# EAGLE board meteo-slave (EAGLE 9.0.0)
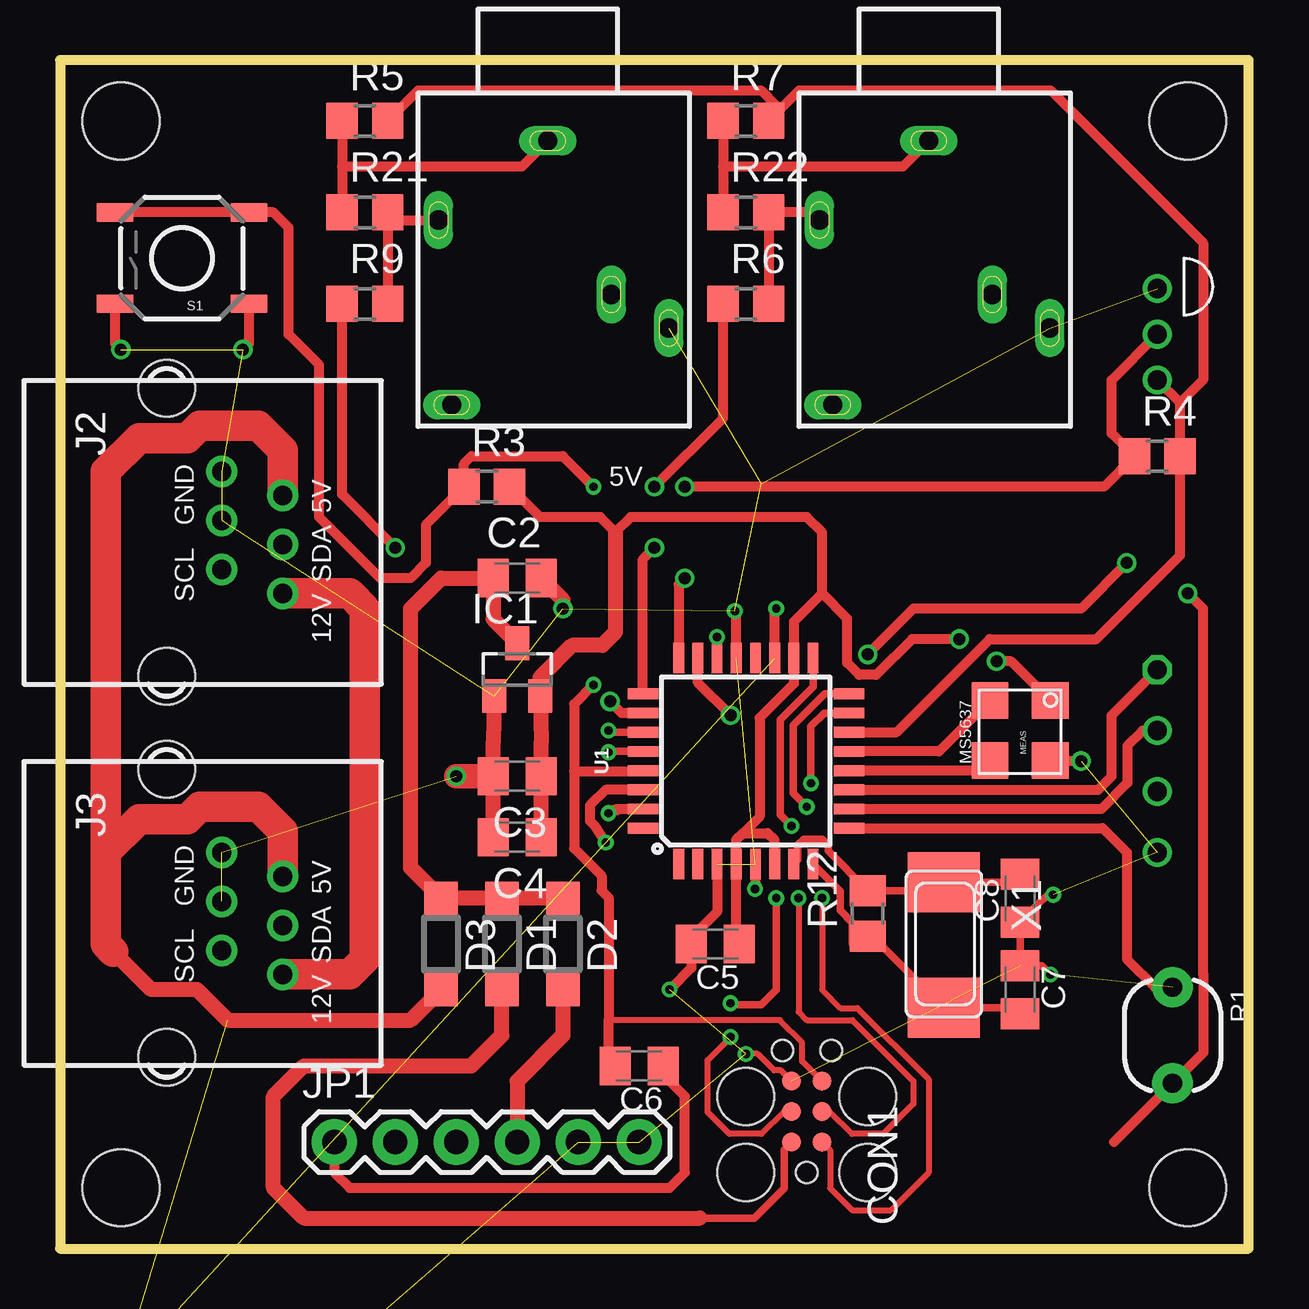
[diagram p0: board, top side]
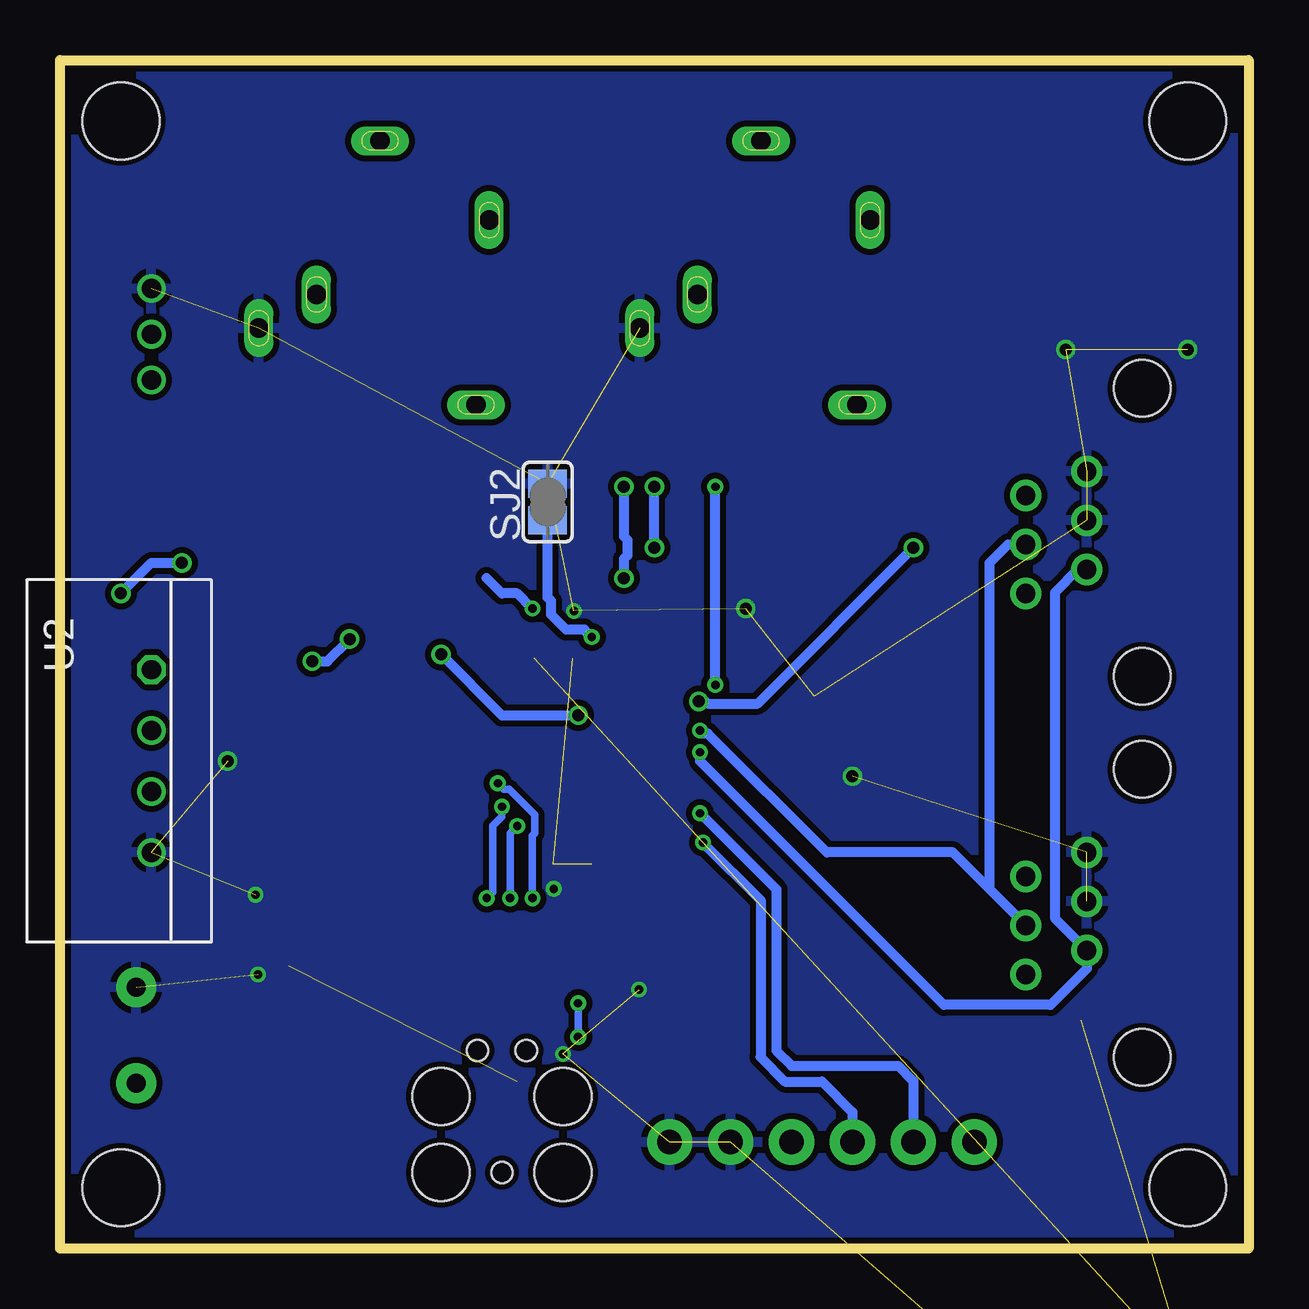
[diagram p1: board, bottom side, seen from below]

Size 49.53 x 49.53 mm. Coordinates in mm from the lower left corner, seen from the top.
Outline: 0,0 49.53,0 49.53,49.53 0,49.53 0,0
Copper layers (1*16): Top 0.035mm / dielectric 0.2mm / Bottom 0.035mm
Design rules "SeeedStudio_DRU_no_angle_20130527 *": minimum track width 8mil, minimum drill 12mil, track to track 6mil, track to pad 6mil, pad to pad 6mil, via to via 6mil, smd to smd 0mil, copper to edge 10mil, drill to drill 10mil, minimum pad ring 6mil, minimum via ring 6mil, stop-mask expansion 2mil, vias tented up to drill 25mil, thermal gap 10mil
Net classes: 0 default: width 0.254 mm, clearance 0.25 mm; 1 power: width 0.254 mm, drill 0.305 mm, clearance 0.25 mm; 2 VIN: width 0.406 mm, clearance 0.25 mm; 3 fine: width 0.406 mm, clearance 0.25 mm; 4 aref: width 0.406 mm, clearance 0.25 mm
Holes 3.2 mm at 2.54,46.99 46.99,46.99 46.99,2.54 2.54,2.54

## Footprints (pad centres in the part's own frame; a part is rotated, then mirrored left to right if it is on the bottom)
C0805K = smd 1.3 x 1.6: 1 -1,0; 2 1,0
TC2030-MCP = smd 0.787 x 0.787: 5V 1.27,0.635; GND 3.81,0.635; MISO 1.27,-0.635; MOSI 2.54,0.635; RESET 3.81,-0.635; SCK 2.54,-0.635 | hole 0.889: 0,0; 5.08,-1.016; 5.08,1.016 | hole 2.375: 0,2.54; 0,-2.54; 3.175,-2.54; 3.175,2.54
SOD123 = smd 1.4 x 1.4: A 1.9,0; C -1.9,0
SOT23 = smd 1 x 1.4: 1 -0.95,-1.1; 2 0.95,-1.1; 3 0,1.1
RJ12-RIGHTANGLE-I2C = drill 0.8 pad 1.3: +5V -1.54,4.84; +12V 2.54,4.84; GND1 -2.54,2.3; GND2 -0.5,2.3; SCL 1.54,2.3; SDA 0.5,4.84 | hole 2.36: -6,0; 6,0
1X06 = drill 1.016 pad 1.88: 1 0,0; 2 2.54,0; 3 5.08,0; 4 7.62,0; 5 10.16,0; 6 12.7,0
PHOTOCELL = drill 0.8 pad 1.676: 1 -2,0; 2 2,0
R0805 = smd 1.3 x 1.5: 1 -0.95,0; 2 0.95,0
TACTILE-SWITCH-SMD-ALT01 = smd 1.524 x 0.762: 1 -2.794,1.905; 2 2.794,1.905; 3 -2.794,-1.905; 4 2.794,-1.905
SJ = smd 1.168 x 1.6: 1 -0.762,0; 2 0.762,0
TQFP32-08 = smd 1.27 x 0.45: 1 -4.293,2.8; 2 -4.293,2; 3 -4.293,1.2; 4 -4.293,0.4; 5 -4.293,-0.4; 6 -4.293,-1.2; 7 -4.293,-2; 8 -4.293,-2.8; 17 4.293,-2.8; 18 4.293,-2; 19 4.293,-1.2; 20 4.293,-0.4; 21 4.293,0.4; 22 4.293,1.2; 23 4.293,2; 24 4.293,2.8 | smd 0.45 x 1.27: 9 -2.8,-4.293; 10 -2,-4.293; 11 -1.2,-4.293; 12 -0.4,-4.293; 13 0.4,-4.293; 14 1.2,-4.293; 15 2,-4.293; 16 2.8,-4.293; 25 2.8,4.293; 26 2,4.293; 27 1.2,4.293; 28 0.4,4.293; 29 -0.4,4.293; 30 -1.2,4.293; 31 -2,4.293; 32 -2.8,4.293
RHT03_DHT-22 = drill 0.8: DATA -1.27,0; GND 3.81,0; NULL 1.27,0 | drill 0.8 octagon: VDD -3.81,0
DS1820 = drill 0.8: DQ 2.54,-1.27; GND 0.635,-1.27; VDD 4.445,-1.27
MS5637WIDE = smd 1.524 x 1.524: GND 1.254,1.254; SCL 1.254,-1.254; SDA -1.254,-1.254; VDD -1.254,1.254
NX6035 = smd 2.5 x 3: P$1 2.665,0; P$2 -2.565,0
1503_09 = drill 0.8 pad 1.2 long: 1 0,-2.1; 2 -4.55,-5.4; 3 5.05,-9.9; 4 -4,-13.1; 5 2.65,-8.5

## Placement (x,y rotation side)
C2  10u  [C0805K]  19.05,27.94 0 top
C3  10u  [C0805K]  19.05,19.68 180 top
C4  100nF  [C0805K]  19.05,17.14 180 top
C5  100nF  [C0805K]  27.3,12.7 180 top
C6  100nF  [C0805K]  24.13,7.62 180 top
C7  18pF  [C0805K]  40.01,10.79 270 top
C8  18pF  [C0805K]  40.01,14.61 90 top
C11  100nF  [C0805K]  0.64,-20.32 0 top  (outside the outline)
CON1  SPI  [TC2030-MCP]  31.11,3.17 90 top
D1  Schottky  [SOD123]  18.41,12.7 270 top
D2  Schottky  [SOD123]  20.95,12.7 270 top
D3  Schottky  [SOD123]  15.88,12.7 270 top
IC1  MCP1703CB  [SOT23]  19.05,24.13 0 top
J2  RJ12RIGHTANGLE-I2C  [RJ12-RIGHTANGLE-I2C]  4.45,29.84 270 top
J3  RJ12RIGHTANGLE-I2C  [RJ12-RIGHTANGLE-I2C]  4.45,13.97 270 top
JP1  FTDI Basic  [1X06]  11.43,4.45 0 top
R1  PHOTOCELLPTH  [PHOTOCELL]  46.35,8.89 270 top
R3  10k  [R0805]  17.78,31.75 0 top
R4  4.7k  [R0805]  45.72,33.02 0 top
R5  100  [R0805]  12.7,46.99 0 top
R6  1K  [R0805]  28.57,39.37 0 top
R7  100  [R0805]  28.57,46.99 0 top
R9  1K  [R0805]  12.7,39.37 0 top
R12  1M  [R0805]  33.66,13.97 90 top
R18  1M  [R0805]  0.64,-8.26 0 top  (outside the outline)
R19  100k  [R0805]  0.64,-14.61 0 top  (outside the outline)
R21  4.7k  [R0805]  12.7,43.18 0 top
R22  4.7k  [R0805]  28.57,43.18 0 top
S1  Reset  [TACTILE-SWITCH-SMD-ALT01]  5.08,41.27 180 top
SJ2  A1  [SJ]  29.21,31.11 90 bottom
U1  ATMEGA328P_TQFP  [TQFP32-08]  28.57,20.32 90 top
U2  [RHT03_DHT-22]  45.72,20.32 270 bottom
U$1  DS1820TO92  [DS1820]  46.99,40.64 270 top
U$19  MS5637WIDE  [MS5637WIDE]  40.01,21.59 270 top
X1  8MHz  [NX6035]  36.83,12.7 270 top
X2  1503_09  [1503_09]  20.32,48.26 0 top
X3  1503_09  [1503_09]  36.2,48.26 0 top

## Library data of the parts
C2 C3 = rcl; ELECROW: C15850; LCSC: C15850; MPN: 77-VJ1206V106ZXQTBC
C4-C6 C11 = rcl; ELECROW: C49678; LCSC: C49678; MPN: 80-C1206C104K5R
C7 C8 = rcl; ELECROW: C1797; LCSC: C1797; MPN: 77-VJ1206A180JXXPBC
CON1 J2 J3 = lpatiny
D1-D3 = diode; LCSC: C82544; MPN: 621-1N5819HW-F
IC1 = linear; LCSC: C53352
JP1 R1 = SparkFun
R3 = rcl; ELECROW: C17513; LCSC: C17513
R4 R21 R22 = resistor
R5-R7 R9 = rcl
R12 R18 R19 = rcl; ELECROW: C17514; LCSC: C17514
S1 = Testing
SJ2 = jumper
U1 = SparkFun-IC-Microcontroller; PROD_ID: IC-09069
U2 = RHT03_DHT-22_AM2302; PROD_ID: SEN-10167
U$1 = Ava
U$19 = MS5637
X1 = lpatiny; LCSC: C122522; MPN: 729-F60800010
X2 X3 = con-lumberg; OC_FARNELL: 1243244; OC_NEWARK: unknown

## Nets
+5V: D3.A J2.+5V J3.+5V R18.2
+12V [power]: J2.+12V J3.+12V
+XV: C2.1 D1.C D2.C D3.C IC1.3
A0: R1.2 U1.23
A1: R4.1 U1.24 U$1.DQ
A2: R6.1 U1.25
A3: R9.1 U1.26
A6: C11.2 R18.1 R19.2 U1.19
A7: SJ2.1 U1.22
D2: U1.32
D3: U1.1
D4: U1.2
D5: U1.9
D6: U1.10 U2.DATA
D7: U1.11 U2.VDD
D8: U1.12 U$19.SCL
D9: U1.13 U$19.SDA
D10: R4.2 R5.2 R7.2 U1.14 U$1.VDD
DTR: C6.1 JP1.1
GND [power]: C2.2 C3.2 C4.2 C5.2 C7.1 C8.1 C11.1 CON1.GND IC1.1 J2.GND1 J2.GND2 J3.GND1 J3.GND2 JP1.5 JP1.6 R1.1 R19.1 S1.1 S1.2 SJ2.2 U1.3 U1.5 U1.21 U2.GND U$1.GND U$19.GND X2.3 X3.3
MISO: CON1.MISO U1.16
MOSI: CON1.MOSI U1.15
N$1 [power]: R6.2 R22.2 X3.2
N$2 [power]: R7.1 R22.1 X3.1
N$14 [power]: R5.1 R21.1 X2.1
N$21 [power]: R9.2 R21.2 X2.2
RESET: C6.2 CON1.RESET R3.1 S1.3 S1.4 U1.29
RX: JP1.3 U1.30
SCK: CON1.SCK U1.17
SCL: J2.SCL J3.SCL U1.28
SDA: J2.SDA J3.SDA U1.27
TX: JP1.2 U1.31
VCC: C3.1 C4.1 C5.1 IC1.2 R3.2 U1.4 U1.6 U1.18 U$19.VDD
VCC-FTDI: D2.A JP1.4
VCC-ICSP: CON1.5V D1.A
XTAL1: C8.2 R12.2 U1.7 X1.P$2
XTAL2: C7.2 R12.1 U1.8 X1.P$1

## Tracks (layer width: path | path; a pad name or v marks a point on that pad's centre or on a via)
+5V  (1 unrouted)
  Top 0.635: 1.91,12.7 2.22,12.38 3.81,10.79 5.71,10.79 6.98,9.53 14.61,9.53 D3.A
  Top 1.27: J2.+5V 9.29,33.26 8.26,34.29 5.82,34.29 5.3,33.78 3.3,33.78 1.91,32.38 1.91,27.94 1.91,16.51 | 1.91,16.51 1.91,12.7 2.22,12.38 | J3.+5V 9.29,17.39 8.26,18.41 5.82,18.41 5.3,17.9 3.3,17.9 1.91,16.51
+12V
  Top 1.27: J3.+12V 12.06,11.43 12.7,12.06 12.7,26.67 12.06,27.3 J2.+12V
+XV
  Top 0.635: D2.C D1.C D3.C 14.61,15.87 14.61,26.67 15.88,27.94 C2.1 18.05,26.23 IC1.3
A0  (via drill 0.5)
  Top 0.406: 43.91,4.45 R1.2 47.65,8.18 47.65,11.43 47.62,11.45 47.62,26.67 v46.99,27.3 | v44.45,28.57 42.55,26.67 35.56,26.67 v33.66,24.77 | v27.94,22.23 26.57,23.59 U1.23
  Bottom 0.406: v46.99,27.3 45.72,28.57 v44.45,28.57 | v33.66,24.77 31.11,22.23 v27.94,22.23
A1  (via drill 0.5)
  Top 0.406: U$1.DQ 43.81,36.2 43.81,33.98 R4.1 43.5,31.75 v26.04,31.75 | v26.04,27.94 25.77,27.68 U1.24
  Bottom 0.406: v26.04,31.75 26.04,29.68 25.89,29.53 25.89,28.89 26.04,28.74 v26.04,27.94
A2  (via drill 0.5)
  Top 0.406: U1.25 24.28,28.73 v24.77,29.21 | v24.77,31.75 27.62,34.61 R6.1
  Bottom 0.406: v24.77,29.21 v24.77,31.75
A3  (via drill 0.5)
  Top 0.406: U1.26 23.4,22.32 v22.92,22.8 | v13.97,29.21 11.75,31.43 R9.1
  Bottom 0.406: v22.92,22.8 22.64,22.8 22.55,22.71 20.47,22.71 v13.97,29.21
A6  (via drill 0.35)  (3 unrouted)
  Top 0.406: U1.19 29.77,26.6 v29.84,26.67
  Bottom 0.406: v29.84,26.67 30.48,27.3 31.11,27.3 31.75,27.94
A7  (via drill 0.35)
  Top 0.406: U1.22 v27.38,25.49
  Bottom 0.406: v27.38,25.49 27.68,25.79 28.44,25.79 29.06,26.42 29.06,26.99 29.21,27.14 SJ2.1
D5
  Top 0.406: U1.9 43.44,17.52 44.45,16.51 44.45,12.06 45.62,10.89
D6
  Top 0.406: U2.DATA 45.11,21.59 44.47,20.95 44.47,19.41 43.38,18.32 U1.10
D7
  Top 0.406: U1.11 43.25,19.12 43.81,19.68 43.81,22.23 U2.VDD
D8
  Top 0.406: U$19.SCL 38.34,19.92 U1.12
D9
  Top 0.406: U$19.SDA 36.63,20.72 U1.13
D10
  Top 0.406: 46.67,35.24 R4.2 46.67,28.89 43.18,25.4 38.73,25.4 34.85,21.52 U1.14 | 46.67,35.24 U$1.VDD | R5.2 14.92,48.26 29.21,48.26 29.84,47.62 29.52,47.3 R7.2 30.8,48.26 41.27,48.26 47.62,41.91 47.62,36.2 46.67,35.24
DTR
  Top 0.406: JP1.1 11.43,3.17 12.06,2.54 25.4,2.54 26.04,3.17 26.04,6.35 25.13,7.25 C6.1
GND  (via drill 0.35, 0.5)  (23 unrouted)
  Top 0.254: CON1.GND 30.04,7.43 29.76,7.43 29.07,8.12 v28.57,8.12
  Top 0.305: v41.27,11.43 40.91,11.79 C7.1 C8.1 40.95,14.55 40.97,14.55 41.17,14.75 v41.38,14.75
  Top 0.406: U1.3 27.38,14.04 26.67,13.34 26.67,13.06 C5.2 26.3,11.7 v25.4,10.79 | U1.21 28.18,26.35 28.12,26.4 v28.12,26.57 | U1.5 28.98,15.02 v28.96,14.99 | U$19.GND 42.53,20.34 v42.55,20.32 | S1.1 7.87,37.72 v7.62,37.47 | S1.2 2.29,37.72 v2.54,37.47
  Top 0.635: IC1.1 18.05,21.07 C3.2 C4.2 | C2.2 20.95,27.04 v20.95,26.67
  Top 1.016: C3.2 v16.51,19.68
  pour Bottom: 0,49.53 0,0 49.53,0 49.53,49.53
MISO  (via drill 0.35)
  Top 0.254: CON1.MISO 32.09,4.11 32.09,2.52 33.01,1.61 34.63,1.61 36.2,3.17 36.2,7.06 33.23,10.03 32.52,10.03 31.75,10.79 v31.75,14.61
  Top 0.305: v31.11,18.41 30.56,18.97 30.56,21.82 31.86,23.12 U1.16
  Bottom 0.305: v31.11,18.41 31.11,18.01 31.5,17.62 31.5,14.85 v31.75,14.61
MOSI  (via drill 0.35)
  Top 0.254: CON1.MOSI 30.16,5.71 29.23,4.78 27.89,4.78 26.98,5.69 26.98,7.86 v27.94,8.82
  Top 0.305: v31.29,19.39 31.29,21.76 31.84,22.32 U1.15 | v29.84,14.61 29.84,10.79 29.21,10.16 28.01,10.16 v27.94,10.23
  Bottom 0.305: v31.29,19.39 31.04,19.14 30.81,19.14 29.75,18.08 29.75,17.31 29.84,17.21 v29.84,14.61 | v27.94,10.23 v27.94,8.82
N$1
  Top 0.406: X3.2 31.32,43.18 R22.2 R6.2
N$2
  Top 0.406: R7.1 27.62,45.09 | 27.62,45.09 R22.1 | X3.1 35.12,45.09 27.62,45.09
N$14
  Top 0.406: R5.1 11.75,45.09 | 11.75,45.09 R21.1 | X2.1 19.25,45.09 11.75,45.09
N$21
  Top 0.406: R9.2 R21.2 13.97,42.86 X2.2
RESET  (via drill 0.35)
  Top 0.254: CON1.RESET 30.92,7.81 30.92,8.6 30,9.53 22.86,9.53
  Top 0.406: U1.29 24.27,19.91 21.42,19.91 | C6.2 22.86,7.89 22.86,9.53 22.86,14.62 22.57,14.92 22.57,15.53 21.42,16.68 21.42,19.91 | v22.23,23.5 21.42,22.69 21.42,19.91 | S1.4 S1.3 8.89,43.18 9.53,42.55 9.53,38.1 10.79,36.83 10.79,30.48 13.34,27.94 14.61,27.94 15.24,28.57 15.24,30.16 R3.1 16.83,32.7 17.14,33.02 20.95,33.02 v22.23,31.75
  Bottom 0.406: v22.23,23.5 v22.23,31.75
RX  (via drill 0.35)
  Top 0.406: v22.74,16.92 22.28,17.62 22.08,17.82 22.08,18.47 22.73,19.12 U1.30
  Bottom 0.406: v22.74,16.92 20.34,14.52 20.34,7.98 19.32,6.96 17.78,6.96 16.51,5.69 JP1.3
SCK  (via drill 0.35)
  Top 0.254: CON1.SCK 32.07,5.71 33.01,4.78 34.3,4.78 35.56,6.04 35.56,6.99 33.02,9.53 31.11,9.53 30.77,9.87 v30.77,14.61
  Top 0.305: v30.48,17.61 30,18.09 30,22.05 31.38,23.42 U1.17
  Bottom 0.305: v30.48,17.61 30.77,17.32 v30.77,14.61
SCL  (via drill 0.35)
  Top 0.305: U1.28 22.86,20.72 v22.86,20.68
  Top 0.406: v22.86,20.68 22.89,20.72
  Bottom 0.406: J2.SCL 7.12,28.3 8.06,27.36 8.06,13.74 J3.SCL 6.75,11.67 8.26,10.16 12.7,10.16 22.86,20.32 v22.86,20.68
SDA  (via drill 0.35)
  Top 0.305: U1.27 22.93,21.52
  Top 0.406: 22.93,21.52 v22.86,21.59
  Bottom 0.406: J2.SDA 10.03,29.34 10.79,28.57 10.79,14.98 | 10.79,14.98 J3.SDA | v22.86,21.59 22.74,21.47 22.54,21.47 17.58,16.51 12.32,16.51 10.79,14.98
TX  (via drill 0.35)
  Top 0.406: v22.86,18.14 22.98,18.27 23.18,18.27 23.18,18.32 U1.31
  Bottom 0.406: v22.86,18.14 19.68,14.97 19.68,8.26 19.05,7.62 14.61,7.62 13.97,6.99 JP1.2
VCC  (via drill 0.5)
  Top 0.406: C5.1 28.18,12.83 U1.4 28.18,17.03 28.46,17.32 | 31.75,27.3 30.57,26.13 U1.18 30.57,23.55 29.15,22.12 29.15,18 28.46,17.32 | 31.75,27.3 31.75,29.84 31.11,30.48 23.78,30.48 23.15,29.84 22.51,30.48 20,30.48 R3.2 | U1.6 29.77,17.03 29.49,17.32 28.46,17.32 | U$19.VDD 39.63,24.48 v39.02,24.48 | 31.75,27.3 32.8,26.26 32.8,24.41 33.3,23.91 34.01,23.91 35.5,25.4 v37.47,25.4
  Top 0.635: C4.1 C3.1 20.05,21.07 IC1.2 20,23.81 21.33,25.14 22.6,25.14 23.15,25.69 23.15,29.84
  Bottom 0.406: v39.02,24.48 38.39,24.48 v37.47,25.4
VCC-FTDI
  Top 0.635: D2.A 20.95,8.89 19.05,6.99 JP1.4
VCC-ICSP
  Top 0.305: CON1.5V 30.17,4.13 30.17,2.52 28.92,1.27 26.67,1.27
  Top 0.635: 26.67,1.27 10.16,1.27 8.89,2.54 8.89,6.35 10.16,7.62 17.14,7.62 18.41,8.89 D1.A
XTAL1
  Top 0.305: U1.7 30.75,16.2 30.75,16.83 30.98,17.07 31.77,17.07 32,16.83 32,16.57 R12.2 36.48,14.92 X1.P$2 39.66,15.27 C8.2
XTAL2
  Top 0.305: U1.8 32.5,14.9 32.5,14.1 33.02,13.59 33.02,12.7 33.34,12.7 R12.1 33.84,13.02 X1.P$1 39.77,10.04 C7.2

## Text on the board
tNames: 5V
tValues: Slave I2C - Meteo V1.0.0
bValues: Slave I2C - Meteo V1.0.0 | A1 | A0